# EAGLE board itrope-Hive (EAGLE 7.7.0)
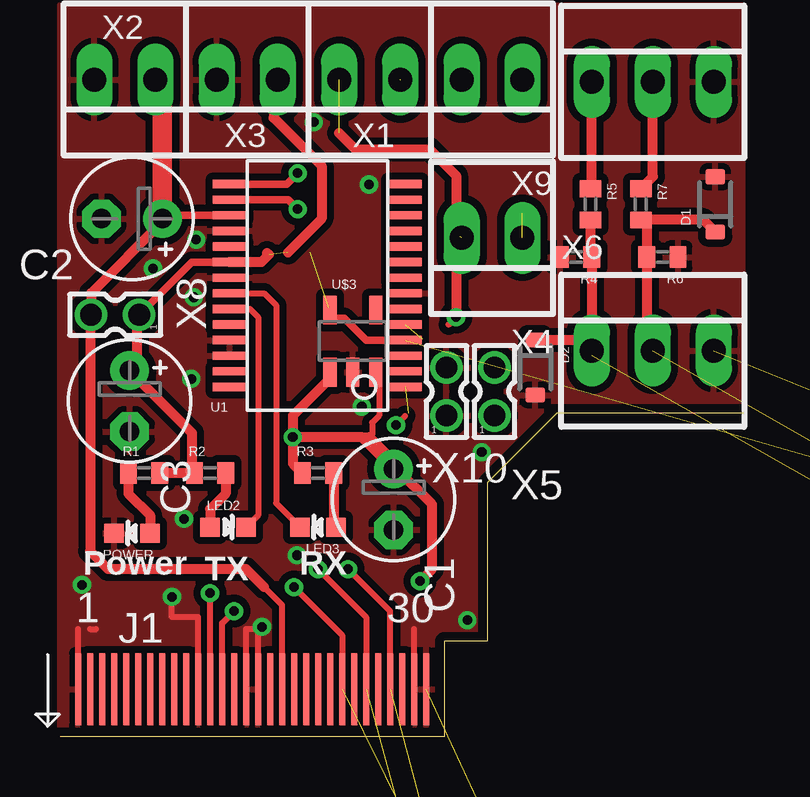
[diagram p0: board, top side]
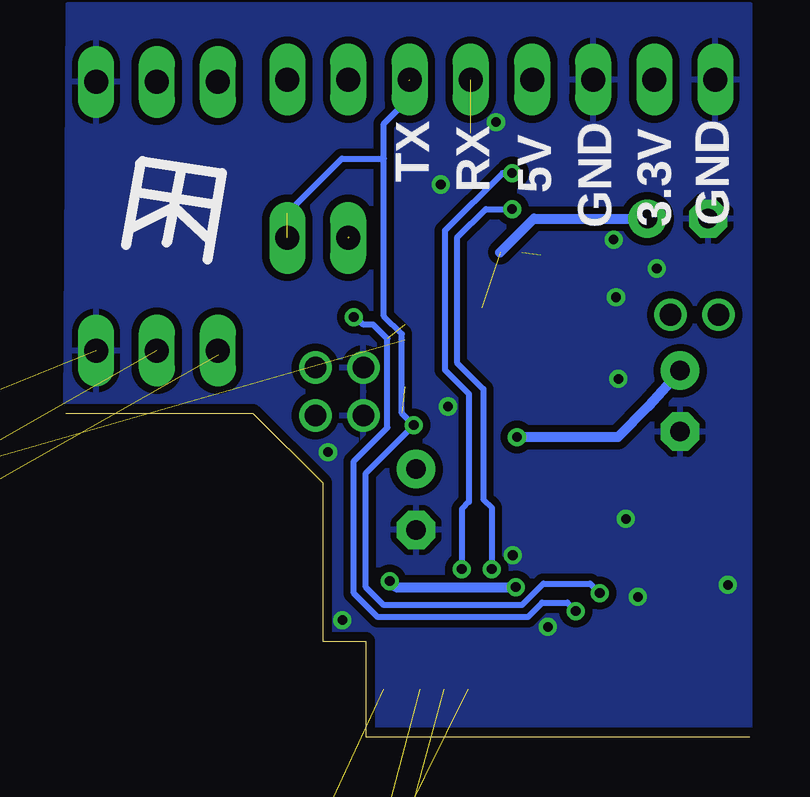
[diagram p1: board, bottom side, seen from below]

Size 28.5 x 13.48 mm. Coordinates in mm from the lower left corner, seen from the top.
Outline: 28.5,13.48 20.7,13.48 17.8,10.58 17.8,3.98 16,3.98 16,0 0,0
Copper layers (1*16): Top 0.0356mm / dielectric 1.5011mm / Bottom 0.0356mm
Design rules "LaenPCBOrder": minimum track width 6mil, minimum drill 13mil, track to track 6mil, track to pad 6mil, pad to pad 6mil, via to via 6mil, smd to smd 6mil, copper to edge 15mil, drill to drill 6mil, minimum pad ring 7mil, minimum via ring 7mil, stop-mask expansion 3mil, vias tented up to drill 0mil, thermal gap 10mil
Net classes: 1 vcc: width 0.203 mm

## Footprints (pad centres in the part's own frame; a part is rotated, then mirrored left to right if it is on the bottom)
E2,5-5 = drill 0.813 pad 1.6: + -1.27,0 | drill 0.813 pad 1.6 octagon: - 1.27,0
SOD-323 = smd 0.63 x 0.83: 1 -1.15,0; 2 1.15,0
30PINEDGE+ITRIP = smd 0.25 x 3: P$1 7.25,1.5; P$2 6.75,1.5; P$3 6.25,1.5; P$4 5.75,1.5; P$5 5.25,1.5; P$6 4.75,1.5; P$7 4.25,1.5; P$8 3.75,1.5; P$9 3.25,1.5; P$10 2.75,1.5; P$11 2.25,1.5; P$12 1.75,1.5; P$13 1.25,1.5; P$14 0.75,1.5; P$15 0.25,1.5; P$16 -0.25,1.5; P$17 -0.75,1.5; P$18 -1.25,1.5; P$19 -1.75,1.5; P$20 -2.25,1.5; P$21 -2.75,1.5; P$22 -3.25,1.5; P$23 -3.75,1.5; P$24 -4.25,1.5; P$25 -4.75,1.5; P$26 -5.25,1.5; P$27 -5.75,1.5; P$28 -6.25,1.5; P$29 -6.75,1.5; P$30 -7.25,1.5
CUI-SJ-4351-CUSTOM = smd 1 x 1: 1 0.6,-3.7 | smd 2.8 x 2.8: 2 12.8,-3.7; 5 16.9,0.75 | smd 2.2 x 2.8: 3 5.3,3.7; 4 3.4,-3.7 | smd 2 x 2.8: 6 2.5,3.7 | hole 1.7: 4.5,0; 11.5,0
LED-0603 = smd 0.8 x 0.8: A 0,-0.75; C 0,0.75
C0402 = smd 0.7 x 0.9: 1 -0.65,0; 2 0.65,0
SSOP28DB = smd 0.348 x 1.397: 1 -4.225,-3.656; 2 -3.575,-3.656; 3 -2.925,-3.656; 4 -2.275,-3.656; 5 -1.625,-3.656; 6 -0.975,-3.656; 7 -0.325,-3.656; 8 0.325,-3.656; 9 0.975,-3.656; 10 1.625,-3.656; 11 2.275,-3.656; 12 2.925,-3.656; 13 3.575,-3.656; 14 4.225,-3.656; 15 4.225,3.656; 16 3.575,3.656; 17 2.925,3.656; 18 2.275,3.656; 19 1.625,3.656; 20 0.975,3.656; 21 0.325,3.656; 22 -0.325,3.656; 23 -0.975,3.656; 24 -1.625,3.656; 25 -2.275,3.656; 26 -2.925,3.656; 27 -3.575,3.656; 28 -4.225,3.656
SOT23-5 = smd 0.55 x 1.2: 1 -0.95,-1.3; 2 0,-1.3; 3 0.95,-1.3; 4 0.95,1.3; 5 -0.95,1.3
22-23-2021 = drill 1 long: 1 -1.27,0; 2 1.27,0
87758-0216 = drill 0.9 pad 1.27: 1 0,-1; 2 0,1
22-23-2031 = drill 1 long: 1 -2.54,0; 2 0,0; 3 2.54,0

## Placement (x,y rotation side)
C1  10uF  [E2,5-5]  13.9,9.88 270 top
C2  0.1uF  [E2,5-5]  3,21.58 180 top  (outside the outline)
C3  0.1uF  [E2,5-5]  2.9,13.98 270 top
C4  10uF  [E2,5-5]  80.7,2.48 180 top  (outside the outline)
C5  0.1uF  [E2,5-5]  62.1,2.48 180 top  (outside the outline)
C6  0.1uF  [E2,5-5]  28.3,-28.92 0 top  (outside the outline)
C7  10uF  [E2,5-5]  148,-111.72 180 top  (outside the outline)
C8  0.1uF  [E2,5-5]  129.4,-111.72 180 top  (outside the outline)
C9  0.1uF  [E2,5-5]  218,2.68 180 top  (outside the outline)
C10  10uF  [E2,5-5]  252.8,-213.32 180 top  (outside the outline)
C11  0.1uF  [E2,5-5]  234.2,-213.32 180 top  (outside the outline)
C12  0.1uF  [E2,5-5]  322.8,-98.92 180 top  (outside the outline)
C13  10uF  [E2,5-5]  362,-320.22 180 top  (outside the outline)
C14  0.1uF  [E2,5-5]  343.4,-320.22 180 top  (outside the outline)
C15  0.1uF  [E2,5-5]  432,-205.82 180 top  (outside the outline)
C16  10uF  [E2,5-5]  471,-428.12 180 top  (outside the outline)
C17  0.1uF  [E2,5-5]  452.4,-428.12 180 top  (outside the outline)
C18  0.1uF  [E2,5-5]  541,-313.72 180 top  (outside the outline)
C19  10uF  [E2,5-5]  586.7,-531.82 180 top  (outside the outline)
C20  0.1uF  [E2,5-5]  568.1,-531.82 180 top  (outside the outline)
C21  0.1uF  [E2,5-5]  656.7,-417.42 180 top  (outside the outline)
C22  10uF  [E2,5-5]  731.9,-626.72 0 top  (outside the outline)
C23  0.1uF  [E2,5-5]  750.5,-626.72 0 top  (outside the outline)
C24  0.1uF  [E2,5-5]  661.9,-512.42 0 top  (outside the outline)
C25  10uF  [E2,5-5]  824.5,-701.92 0 top  (outside the outline)
C26  0.1uF  [E2,5-5]  843.1,-701.92 0 top  (outside the outline)
C27  0.1uF  [E2,5-5]  754.5,-587.52 0 top  (outside the outline)
D1  [SOD-323]  27.3,22.18 90 top  (outside the outline)
D2  [SOD-323]  19.8,15.38 270 top
D3  [SOD-323]  52,-72.92 0 top  (outside the outline)
D4  [SOD-323]  55.1,-72.92 0 top  (outside the outline)
D5  [SOD-323]  194.3,46.68 180 top  (outside the outline)
D6  [SOD-323]  191.2,46.68 180 top  (outside the outline)
D7  [SOD-323]  299.1,-54.92 180 top  (outside the outline)
D8  [SOD-323]  296,-54.92 180 top  (outside the outline)
D9  [SOD-323]  408.3,-161.82 180 top  (outside the outline)
D10  [SOD-323]  405.2,-161.82 180 top  (outside the outline)
D11  [SOD-323]  517.3,-269.72 180 top  (outside the outline)
D12  [SOD-323]  514.2,-269.72 180 top  (outside the outline)
D13  [SOD-323]  633,-373.42 180 top  (outside the outline)
D14  [SOD-323]  629.9,-373.42 180 top  (outside the outline)
D15  [SOD-323]  778.2,-715.22 0 top  (outside the outline)
D16  [SOD-323]  781.3,-715.22 0 top  (outside the outline)
D17  [SOD-323]  778.2,-543.62 0 top  (outside the outline)
D18  [SOD-323]  781.3,-543.62 0 top  (outside the outline)
J1  ITRIP-V1  [30PINEDGE+ITRIP]  8,3.48 180 top
J2  ITRIP-V1  [30PINEDGE+ITRIP]  64.2,-50.02 180 top  (outside the outline)
J3  ITRIP-V1  [30PINEDGE+ITRIP]  178.3,-92.92 180 top  (outside the outline)
J4  ITRIP-V1  [30PINEDGE+ITRIP]  283.1,-194.52 180 top  (outside the outline)
J5  ITRIP-V1  [30PINEDGE+ITRIP]  392.3,-301.42 180 top  (outside the outline)
J6  ITRIP-V1  [30PINEDGE+ITRIP]  501.3,-409.32 180 top  (outside the outline)
J7  ITRIP-V1  [30PINEDGE+ITRIP]  617,-513.02 180 top  (outside the outline)
J8  ITRIP-V1  [30PINEDGE+ITRIP]  701.6,-547.32 0 top  (outside the outline)
J9  ITRIP-V1  [30PINEDGE+ITRIP]  794.2,-622.42 0 top  (outside the outline)
J10  [CUI-SJ-4351-CUSTOM]  158.5,-167.42 0 top  (outside the outline)
J11  [CUI-SJ-4351-CUSTOM]  158.5,-184.22 0 top  (outside the outline)
J12  [CUI-SJ-4351-CUSTOM]  158.5,-201.02 0 top  (outside the outline)
J13  [CUI-SJ-4351-CUSTOM]  158.5,-217.82 0 top  (outside the outline)
J14  [CUI-SJ-4351-CUSTOM]  158.5,-234.62 0 top  (outside the outline)
J15  [CUI-SJ-4351-CUSTOM]  158.5,-251.42 0 top  (outside the outline)
J16  [CUI-SJ-4351-CUSTOM]  158.5,-268.22 0 top  (outside the outline)
J17  [CUI-SJ-4351-CUSTOM]  158.5,-285.02 0 top  (outside the outline)
J18  [CUI-SJ-4351-CUSTOM]  158.5,-301.82 0 top  (outside the outline)
LED1  Red  [LED-0603]  58,-72.62 0 top  (outside the outline)
LED2  Red  [LED-0603]  7,8.73 270 top
LED3  Green  [LED-0603]  10.75,8.73 90 top
LED4  Green  [LED-0603]  61,-72.62 0 top  (outside the outline)
LED7  Red  [LED-0603]  293.1,-55.22 180 top  (outside the outline)
LED8  Green  [LED-0603]  290.1,-55.22 180 top  (outside the outline)
LED11  Red  [LED-0603]  511.3,-270.02 180 top  (outside the outline)
LED12  Green  [LED-0603]  508.3,-270.02 180 top  (outside the outline)
LED15  Red  [LED-0603]  784.2,-715.12 0 top  (outside the outline)
LED16  Green  [LED-0603]  787.2,-715.12 0 top  (outside the outline)
POWER  Red  [LED-0603]  3,8.48 90 top
R1  330  [C0402]  3.5,10.98 0 top
R2  1K  [C0402]  6.25,10.98 0 top
R3  1K  [C0402]  10.75,10.98 0 top
R4  10k  [C0402]  21.5,19.98 180 top  (outside the outline)
R5  33k  [C0402]  22.1,22.18 270 top  (outside the outline)
R6  10k  [C0402]  25.1,19.98 180 top  (outside the outline)
R7  33k  [C0402]  24.2,22.18 270 top  (outside the outline)
R9  1K  [C0402]  30.4,-72.92 0 top  (outside the outline)
R10  1K  [C0402]  33.5,-72.92 0 top  (outside the outline)
R11  10k  [C0402]  36.6,-72.92 0 top  (outside the outline)
R12  33k  [C0402]  39.7,-72.92 0 top  (outside the outline)
R13  10k  [C0402]  42.8,-72.92 0 top  (outside the outline)
R14  33k  [C0402]  45.9,-72.92 0 top  (outside the outline)
R18  10k  [C0402]  209.7,46.68 180 top  (outside the outline)
R19  33k  [C0402]  206.6,46.68 180 top  (outside the outline)
R20  10k  [C0402]  203.5,46.68 180 top  (outside the outline)
R21  33k  [C0402]  200.4,46.68 180 top  (outside the outline)
R23  1K  [C0402]  320.7,-54.92 180 top  (outside the outline)
R24  1K  [C0402]  317.6,-54.92 180 top  (outside the outline)
R25  10k  [C0402]  314.5,-54.92 180 top  (outside the outline)
R26  33k  [C0402]  311.4,-54.92 180 top  (outside the outline)
R27  10k  [C0402]  308.3,-54.92 180 top  (outside the outline)
R28  33k  [C0402]  305.2,-54.92 180 top  (outside the outline)
R32  10k  [C0402]  423.7,-161.82 180 top  (outside the outline)
R33  33k  [C0402]  420.6,-161.82 180 top  (outside the outline)
R34  10k  [C0402]  417.5,-161.82 180 top  (outside the outline)
R35  33k  [C0402]  414.4,-161.82 180 top  (outside the outline)
R37  1K  [C0402]  538.9,-269.72 180 top  (outside the outline)
R38  1K  [C0402]  535.8,-269.72 180 top  (outside the outline)
R39  10k  [C0402]  532.7,-269.72 180 top  (outside the outline)
R40  33k  [C0402]  529.6,-269.72 180 top  (outside the outline)
R41  10k  [C0402]  526.5,-269.72 180 top  (outside the outline)
R42  33k  [C0402]  523.4,-269.72 180 top  (outside the outline)
R46  10k  [C0402]  648.4,-373.42 180 top  (outside the outline)
R47  33k  [C0402]  645.3,-373.42 180 top  (outside the outline)
R48  10k  [C0402]  642.2,-373.42 180 top  (outside the outline)
R49  33k  [C0402]  639.1,-373.42 180 top  (outside the outline)
R51  1K  [C0402]  756.6,-714.92 0 top  (outside the outline)
R52  1K  [C0402]  759.7,-714.92 0 top  (outside the outline)
R53  10k  [C0402]  762.8,-714.92 0 top  (outside the outline)
R54  33k  [C0402]  765.9,-714.92 0 top  (outside the outline)
R55  10k  [C0402]  769,-714.92 0 top  (outside the outline)
R56  33k  [C0402]  772.1,-714.92 0 top  (outside the outline)
R60  10k  [C0402]  762.8,-543.32 0 top  (outside the outline)
R61  33k  [C0402]  765.9,-543.32 0 top  (outside the outline)
R62  10k  [C0402]  769,-543.32 0 top  (outside the outline)
R63  33k  [C0402]  772.1,-543.32 0 top  (outside the outline)
U1  FT232RL-BASICSSOP  [SSOP28DB]  10.72,18.8 90 top
U2  FT232RL-BASICSSOP  [SSOP28DB]  24.3,-57.42 0 top  (outside the outline)
U4  FT232RL-BASICSSOP  [SSOP28DB]  326.8,-70.42 180 top  (outside the outline)
U6  FT232RL-BASICSSOP  [SSOP28DB]  545,-285.22 180 top  (outside the outline)
U8  FT232RL-BASICSSOP  [SSOP28DB]  657.9,-483.92 0 top  (outside the outline)
U$3  V_REG_SOT23-5_EN  [SOT23-5]  12.2,16.48 0 top
U$7  CREATIVE_COMMONS  [CREATIVE_COMMONS]  40,-70.32 0 top  (outside the outline)
U$9  CREATIVE_COMMONS  [CREATIVE_COMMONS]  61.88,-77.88 180 top  (outside the outline)
U$11  V_REG_SOT23-5_EN  [SOT23-5]  20.5,-74.72 0 top  (outside the outline)
U$16  CREATIVE_COMMONS  [CREATIVE_COMMONS]  206.3,44.08 180 top  (outside the outline)
U$19  V_REG_SOT23-5_EN  [SOT23-5]  225.8,48.48 180 top  (outside the outline)
U$23  CREATIVE_COMMONS  [CREATIVE_COMMONS]  311.1,-57.52 180 top  (outside the outline)
U$26  V_REG_SOT23-5_EN  [SOT23-5]  330.6,-53.12 180 top  (outside the outline)
U$30  CREATIVE_COMMONS  [CREATIVE_COMMONS]  420.3,-164.42 180 top  (outside the outline)
U$33  V_REG_SOT23-5_EN  [SOT23-5]  439.8,-160.02 180 top  (outside the outline)
U$37  CREATIVE_COMMONS  [CREATIVE_COMMONS]  529.3,-272.32 180 top  (outside the outline)
U$40  V_REG_SOT23-5_EN  [SOT23-5]  548.8,-267.92 180 top  (outside the outline)
U$44  CREATIVE_COMMONS  [CREATIVE_COMMONS]  645,-376.02 180 top  (outside the outline)
U$47  V_REG_SOT23-5_EN  [SOT23-5]  664.5,-371.62 180 top  (outside the outline)
U$51  CREATIVE_COMMONS  [CREATIVE_COMMONS]  673.6,-477.42 0 top  (outside the outline)
U$54  V_REG_SOT23-5_EN  [SOT23-5]  746.7,-713.32 0 top  (outside the outline)
U$58  CREATIVE_COMMONS  [CREATIVE_COMMONS]  766.2,-552.52 0 top  (outside the outline)
U$61  V_REG_SOT23-5_EN  [SOT23-5]  746.7,-541.72 0 top  (outside the outline)
X1  22-23-2021  [22-23-2021]  12.9,27.38 180 top  (outside the outline)
X2  22-23-2021  [22-23-2021]  2.7,27.38 180 top  (outside the outline)
X3  22-23-2021  [22-23-2021]  7.8,27.38 180 top  (outside the outline)
X4  22-23-2021  [22-23-2021]  18,20.78 180 top  (outside the outline)
X5  87758-0216  [87758-0216]  18.1,14.38 0 top
X6  22-23-2031  [22-23-2031]  24.7,16.08 0 top
X7  22-23-2031  [22-23-2031]  24.7,27.28 0 top  (outside the outline)
X8  87758-0216  [87758-0216]  2.3,17.58 90 top  (outside the outline)
X9  22-23-2021  [22-23-2021]  18,27.38 180 top  (outside the outline)
X10  87758-0216  [87758-0216]  16.1,14.38 0 top
X11  22-23-2021  [22-23-2021]  27.8,-44.52 0 top  (outside the outline)
X12  22-23-2021  [22-23-2021]  150.1,-19.22 0 top  (outside the outline)
X14  22-23-2031  [22-23-2031]  102.6,-28.32 0 top  (outside the outline)
X15  22-23-2031  [22-23-2031]  122.7,-28.32 0 top  (outside the outline)
X24  22-23-2031  [22-23-2031]  143.7,2.08 180 top  (outside the outline)
X25  22-23-2031  [22-23-2031]  123.6,2.08 180 top  (outside the outline)
X31  22-23-2021  [22-23-2021]  323.3,-83.32 180 top  (outside the outline)
X34  22-23-2031  [22-23-2031]  248.5,-99.52 180 top  (outside the outline)
X35  22-23-2031  [22-23-2031]  228.4,-99.52 180 top  (outside the outline)
X44  22-23-2031  [22-23-2031]  357.7,-206.42 180 top  (outside the outline)
X45  22-23-2031  [22-23-2031]  337.6,-206.42 180 top  (outside the outline)
X51  22-23-2021  [22-23-2021]  541.5,-298.12 180 top  (outside the outline)
X54  22-23-2031  [22-23-2031]  466.7,-314.32 180 top  (outside the outline)
X55  22-23-2031  [22-23-2031]  446.6,-314.32 180 top  (outside the outline)
X64  22-23-2031  [22-23-2031]  582.4,-418.02 180 top  (outside the outline)
X65  22-23-2031  [22-23-2031]  562.3,-418.02 180 top  (outside the outline)
X71  22-23-2021  [22-23-2021]  661.4,-496.82 0 top  (outside the outline)
X74  22-23-2031  [22-23-2031]  736.2,-513.02 0 top  (outside the outline)
X75  22-23-2031  [22-23-2031]  756.3,-513.02 0 top  (outside the outline)
X84  22-23-2031  [22-23-2031]  828.8,-588.12 0 top  (outside the outline)
X85  22-23-2031  [22-23-2031]  916.7,-667.52 0 top  (outside the outline)

## Library data of the parts
C1-C27 = rcl
D1-D18 J10-J18 U$3 U$11 U$19 U$26 U$33 U$40 U$47 U$54 U$61 = LITTLEBITS
J1-J9 = con-jae-IPOD-edgecard
LED1-LED4 LED7 LED8 LED11 LED12 LED15 LED16 POWER R1-R7 R9-R14 R18-R21 R23-R28 R32-R35 R37-R42 R46-R49 R51-R56 R60-R63 U1 U2 U4 U6 U8 U$7 U$9 U$16 U$23 U$30 U$37 U$44 U$51 U$58 = SparkFun
X1-X4 X9 X11 X12 X31 X51 X71 = con-molex; MF: MOLEX; MPN: 22-23-2021; OC_FARNELL: 1462926; OC_NEWARK: 25C3832
X5 X8 X10 = con-molex; MPN: 87758-0216; OC_FARNELL: unknown; OC_NEWARK: 94M1513
X6 X7 X14 X15 X24 X25 X34 X35 X44 X45 X54 X55 X64 X65 X74 X75 X84 X85 = con-molex; MF: MOLEX; MPN: 22-23-2031; OC_FARNELL: 1462950; OC_NEWARK: 30C0862

## Nets
5V [vcc]: C1.+ C3.+ C4.+ C6.+ C7.+ C9.+ C10.+ C12.+ C13.+ C15.+ C16.+ C18.+ C19.+ C21.+ C22.+ C24.+ C25.+ C27.+ J1.P$23 J2.P$23 J3.P$23 J4.P$23 J5.P$23 J6.P$23 J7.P$23 J8.P$23 J9.P$23 R1.2 R2.1 R3.1 R9.1 R10.1 R23.1 R24.1 R37.1 R38.1 R51.1 R52.1 U1.20 U2.20 U4.20 U6.20 U8.20 U$3.1 U$3.3 U$11.1 U$11.3 U$19.1 U$19.3 U$26.1 U$26.3 U$33.1 U$33.3 U$40.1 U$40.3 U$47.1 U$47.3 U$54.1 U$54.3 U$61.1 U$61.3 X3.1 X8.1
+3V3: C2.+ C5.+ C8.+ C11.+ C14.+ C17.+ C20.+ C23.+ C26.+ J1.P$18 J2.P$18 J3.P$18 J4.P$18 J5.P$18 J6.P$18 J7.P$18 J8.P$18 J9.P$18 U1.4 U1.17 U2.4 U2.17 U4.4 U4.17 U6.4 U6.17 U8.4 U8.17 U$3.5 U$11.5 U$19.5 U$26.5 U$33.5 U$40.5 U$47.5 U$54.5 U$61.5 X2.1 X8.2
D+: J1.P$27 J2.P$27 J3.P$27 J4.P$27 J5.P$27 J6.P$27 J7.P$27 J8.P$27 J9.P$27 U1.15 U2.15 U4.15 U6.15 U8.15
D-: J1.P$25 J2.P$25 J3.P$25 J4.P$25 J5.P$25 J6.P$25 J7.P$25 J8.P$25 J9.P$25 U1.16 U2.16 U4.16 U6.16 U8.16
GND [vcc]: C1.- C2.- C3.- C4.- C5.- C6.- C7.- C8.- C9.- C10.- C11.- C12.- C13.- C14.- C15.- C16.- C17.- C18.- C19.- C20.- C21.- C22.- C23.- C24.- C25.- C26.- C27.- D1.2 D2.2 D3.2 D4.2 D5.2 D6.2 D7.2 D8.2 D9.2 D10.2 D11.2 D12.2 D13.2 D14.2 D15.2 D16.2 D17.2 D18.2 J1.P$1 J1.P$11 J1.P$15 J1.P$16 J1.P$29 J1.P$30 J2.P$1 J2.P$11 J2.P$15 J2.P$16 J2.P$29 J2.P$30 J3.P$1 J3.P$11 J3.P$15 J3.P$16 J3.P$29 J3.P$30 J4.P$1 J4.P$11 J4.P$15 J4.P$16 J4.P$29 J4.P$30 J5.P$1 J5.P$11 J5.P$15 J5.P$16 J5.P$29 J5.P$30 J6.P$1 J6.P$11 J6.P$15 J6.P$16 J6.P$29 J6.P$30 J7.P$1 J7.P$11 J7.P$15 J7.P$16 J7.P$29 J7.P$30 J8.P$1 J8.P$11 J8.P$15 J8.P$16 J8.P$29 J8.P$30 J9.P$1 J9.P$11 J9.P$15 J9.P$16 J9.P$29 J9.P$30 J10.1 J10.4 J11.1 J11.4 J12.1 J12.4 J13.1 J13.4 J14.1 J14.4 J15.1 J15.4 J16.1 J16.4 J17.1 J17.4 J18.1 J18.4 POWER.C R4.2 R6.1 R11.2 R13.1 R18.2 R20.1 R25.2 R27.1 R32.2 R34.1 R39.2 R41.1 R46.2 R48.1 R53.2 R55.1 R60.2 R62.1 U1.7 U1.18 U1.21 U1.25 U1.26 U2.7 U2.18 U2.21 U2.25 U2.26 U4.7 U4.18 U4.21 U4.25 U4.26 U6.7 U6.18 U6.21 U6.25 U6.26 U8.7 U8.18 U8.21 U8.25 U8.26 U$3.2 U$11.2 U$19.2 U$26.2 U$33.2 U$40.2 U$47.2 U$54.2 U$61.2 X2.2 X3.2 X6.3 X7.3 X10.1 X10.2 X14.3 X15.3 X24.3 X25.3 X34.3 X35.3 X44.3 X45.3 X54.3 X55.3 X64.3 X65.3 X74.3 X75.3 X84.3 X85.3
LEFT: D1.1 D3.1 D5.1 D7.1 D9.1 D11.1 D13.1 D15.1 D17.1 R6.2 R7.2 R13.2 R14.2 R20.2 R21.2 R27.2 R28.2 R34.2 R35.2 R41.2 R42.2 R48.2 R49.2 R55.2 R56.2 R62.2 R63.2 X6.2 X14.2 X24.2 X34.2 X44.2 X54.2 X64.2 X74.2 X84.2
N$1: POWER.A R1.1
N$2: R7.1 X7.2
N$3: LED2.A R2.2
N$4: LED3.A R3.2
N$5: R5.1 X7.1
N$8: LED1.A R9.2
N$9: LED4.A R10.2
N$10: R14.1 X15.2
N$11: R12.1 X15.1
N$15: R21.1 X25.2
N$16: R19.1 X25.1
N$18: LED7.A R23.2
N$19: LED8.A R24.2
N$20: R28.1 X35.2
N$21: R26.1 X35.1
N$25: R35.1 X45.2
N$26: R33.1 X45.1
N$28: LED11.A R37.2
N$29: LED12.A R38.2
N$30: R42.1 X55.2
N$31: R40.1 X55.1
N$35: R49.1 X65.2
N$36: R47.1 X65.1
N$38: LED15.A R51.2
N$39: LED16.A R52.2
N$40: R56.1 X75.2
N$41: R54.1 X75.1
N$45: R63.1 X85.2
N$46: R61.1 X85.1
RIGHT: D2.1 D4.1 D6.1 D8.1 D10.1 D12.1 D14.1 D16.1 D18.1 R4.1 R5.2 R11.1 R12.2 R18.1 R19.2 R25.1 R26.2 R32.1 R33.2 R39.1 R40.2 R46.1 R47.2 R53.1 R54.2 R60.1 R61.2 X6.1 X14.1 X24.1 X34.1 X44.1 X54.1 X64.1 X74.1 X84.1
RXD: J2.P$13 J3.P$13 J4.P$13 J5.P$13 J6.P$13 J7.P$13 J8.P$13 J9.P$13 U2.5 U4.5 U6.5 U8.5 X11.2 X12.2 X31.2 X51.2 X71.2
RXD_COORD: J1.P$13 U1.5 X1.2 X4.2
RXLED: LED3.C U1.22
RXLED1: LED4.C U2.22
RXLED3: LED8.C U4.22
RXLED5: LED12.C U6.22
RXLED7: LED16.C U8.22
TXD: J2.P$12 J3.P$12 J4.P$12 J5.P$12 J6.P$12 J7.P$12 J8.P$12 J9.P$12 U2.1 U4.1 U6.1 U8.1 X11.1 X12.1 X31.1 X51.1 X71.1
TXD_COORD: J1.P$12 U1.1 X1.1 X4.1
TXLED: LED2.C U1.23
TXLED1: LED1.C U2.23
TXLED3: LED7.C U4.23
TXLED5: LED11.C U6.23
TXLED7: LED15.C U8.23

## Tracks (layer width: path | path; a pad name or v marks a point on that pad's centre or on a via)
5V  (via drill 0.4)  (53 unrouted)
  Top 0.254: 10.09,11.18 R3.1 | v9.75,6.23 11.75,4.23 J1.P$23 | 13.9,11.3 13.9,11.18 C1.+ 13,12.05 | U$3.3 13.05,15.18 13.3,14.93 13.3,13.38 13,13.08 13,12.58 12.9,12.48
  Top 0.305: U1.20 5.49,19.77 X8.1
  Top 0.406: v15,6.48 15.5,6.98 15.5,9.67 14.02,11.15 C1.+ 12.57,12.48 | 4,11.13 R1.2 R2.1 5.5,11.08 5.5,12.65 C3.+ 3.2,15.55 3.2,17.48 X8.1 | 10,11.08 R3.1 9.7,11.38 v9.7,12.48 | 12.57,12.48 v9.7,12.48 | U1.20 8.39,19.77 8.7,20.08 8.63,20.15 | 12.57,12.48 12.9,12.48 13.7,11.68 13.7,11.48 14,11.18 13.9,11.18 | U$3.1 11.25,14.93 9.7,13.38 v9.7,12.48 | X3.1 8.9,27.38 8.9,25.78 10.9,23.78 10.9,21.58 9.5,20.18
  Bottom 0.406: v9.7,12.48 5.5,12.48 4.2,13.78 C3.+ | v15,6.48 14.75,6.23 v9.75,6.23
+3V3  (33 unrouted)
  Top 0.254: J1.P$18 9.25,5.48 8.5,6.23
  Top 0.305: U1.4 12.76,16.52 11.85,17.43 11.25,17.43 U$3.5 | 4.63,21.72 4.49,21.58 C2.+ 4.41,21.72 U1.17
  Top 0.406: 8.5,6.23 7.75,6.98 2,6.98 1.25,7.73 1.25,17.53 X8.2 1.3,18.48 4.27,21.45 C2.+ | U$3.5 11.17,17.86
  Top 0.813: X2.1 4.27,27.08 C2.+
  Bottom 0.254: 4.37,21.68 C2.+
  Bottom 0.406: 10.4,20.18 9,21.58 C2.+
D+  (via drill 0.4)  (12 unrouted)
  Top 0.254: J1.P$27 13.75,5.23 v12,6.98
  Top 0.305: v9.9,23.48 9.44,23.02 U1.15
  Bottom 0.254: v9.9,23.48 10.3,23.48 12.7,21.08 12.7,15.28 11.7,14.28 11.7,9.78 12,9.48 v12,6.98
D-  (via drill 0.4)  (12 unrouted)
  Top 0.254: v10.75,6.98 12.75,4.98 J1.P$25
  Top 0.305: v9.9,21.98 9.51,22.37 U1.16
  Bottom 0.254: v9.9,21.98 11,21.98 12.2,20.78 12.2,15.58 11.1,14.48 11.1,9.88 10.75,9.53 v10.75,6.98
GND  (via drill 0.4)  (166 unrouted)
  Top 0.254: 14.32,18.41 U1.7 | 1.25,4.48 1.5,4.48 | J1.P$29 14.75,4.48 | J1.P$16 8.25,4.48 7.75,4.48 J1.P$15 | J1.P$11 5.75,4.98 4.66,4.98 v4.66,5.83 | J1.P$1 0.75,4.48
  other vias: 0.91,6.33 5.16,9.08 8.41,4.58 5.47,14.91 3.87,19.51 5.67,20.71 5.57,18.31 12.87,23.01 10.57,25.61 12.57,13.76 9.87,7.56 17.57,11.86 16.97,4.86
  pour Top (isolate 0.3): 0,30.48 28.4,30.48 28.45,13.43 22.55,13.43 19.7,10.58 19.7,3.98 16.1,3.98 16.1,0 0,0
  pour Bottom (isolate 0.305): 0,30.48 28.4,30.48 28.5,13.48 22.6,13.48 19.7,10.58 19.7,3.98 16.1,3.98 16.1,0 0,0
LEFT  (32 unrouted)
  Top 0.406: X6.2 24.45,16.13 R6.2 24.45,21.28 R7.2 26.8,21.53 D1.1
N$1
  Top 0.254: POWER.A 3.87,8.64 3.75,8.75
  Top 0.406: R1.1 2.85,10.13 3.75,9.23 POWER.A
N$2
  Top 0.406: R7.1 24.7,23.33 X7.2
N$3
  Top 0.406: R2.2 6.9,10.13 6.25,9.48 LED2.A
N$4
  Top 0.406: R3.2 11.4,8.83 LED3.A
N$5
  Top 0.406: R5.1 22.16,22.89 X7.1
N$8  (1 unrouted)
N$9  (1 unrouted)
N$10  (1 unrouted)
N$11  (1 unrouted)
N$15  (1 unrouted)
N$16  (1 unrouted)
N$18  (1 unrouted)
N$19  (1 unrouted)
N$20  (1 unrouted)
N$21  (1 unrouted)
N$25  (1 unrouted)
N$26  (1 unrouted)
N$28  (1 unrouted)
N$29  (1 unrouted)
N$30  (1 unrouted)
N$31  (1 unrouted)
N$35  (1 unrouted)
N$36  (1 unrouted)
N$38  (1 unrouted)
N$39  (1 unrouted)
N$40  (1 unrouted)
N$41  (1 unrouted)
N$45  (1 unrouted)
N$46  (1 unrouted)
RIGHT  (32 unrouted)
  Top 0.305: 22.05,16.53 22.1,16.58
  Top 0.406: 22.1,16.88 22.1,16.58 22.1,15.94 X6.1 | R5.2 22.1,20.03 R4.1 22.15,15.89 X6.1 | D2.1 21.51,16.53 X6.1
RXD  (16 unrouted)
RXD_COORD  (via drill 0.4)  (3 unrouted)
  Top 0.254: v16.5,17.48 16.19,17.17 | J1.P$13 6.75,4.73 v7.25,5.23
  Top 0.406: 16.5,20.78 16.5,23.38 15.4,24.48 12.3,24.48 11.63,25.15 | 16.5,20.78 v16.5,17.48 | 16.62,20.91 16.55,20.83 | 16.55,20.83 16.5,20.78 | 16.68,20.83 16.55,20.83
  Bottom 0.254: v7.25,5.23 7.6,5.58 8.65,5.58 9.25,4.98 15.5,4.98 16.5,5.98 16.5,11.48 15.1,12.88 15.1,16.58 15.69,17.17 16.1,17.17 16.41,17.48 v16.5,17.48
RXLED
  Top 0.254: U1.22 8.51,18.47 9,17.98 9,9.73 LED3.C
RXLED1  (1 unrouted)
RXLED3  (1 unrouted)
RXLED5  (1 unrouted)
RXLED7  (1 unrouted)
TXD  (16 unrouted)
TXD_COORD  (via drill 0.4)  (3 unrouted)
  Top 0.254: v14,12.98 14.38,13.36 | J1.P$12 v6.25,5.98
  Bottom 0.254: v6.25,5.98 6.65,6.38 8.6,6.38 9.5,5.48 15.25,5.48 16,6.23 16,10.98 v14,12.98 14.5,13.48 14.5,16.78 15.24,17.52 15.24,24.08 | 15.24,24.08 15.24,25.54 14.2,26.58 14.2,27.35 | 19.27,21.81 17,24.08 15.24,24.08
TXLED
  Top 0.254: U1.23 7.91,17.82 8.25,17.48 8.25,9.23 LED2.C
TXLED1  (1 unrouted)
TXLED3  (1 unrouted)
TXLED5  (1 unrouted)
TXLED7  (1 unrouted)

## Text on the board
tPlace: TX | Power | RX
bPlace: GND | 3.3V | GND | 5V | RX | TX
Measures: R | L